# EAGLE board PQ60 EPS FV3 (EAGLE 7.4.0)
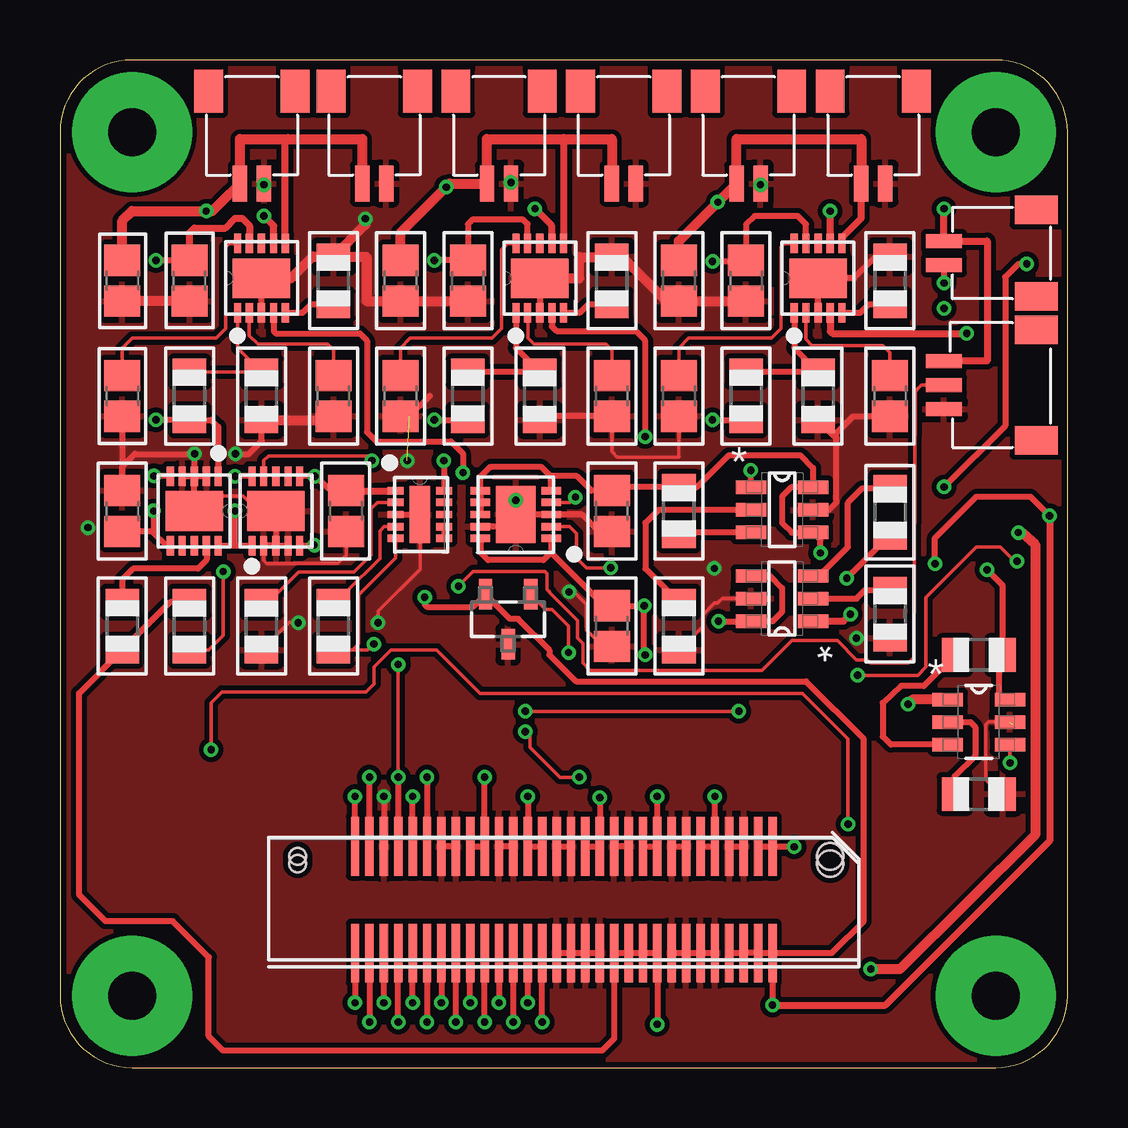
[diagram p0: board, top side]
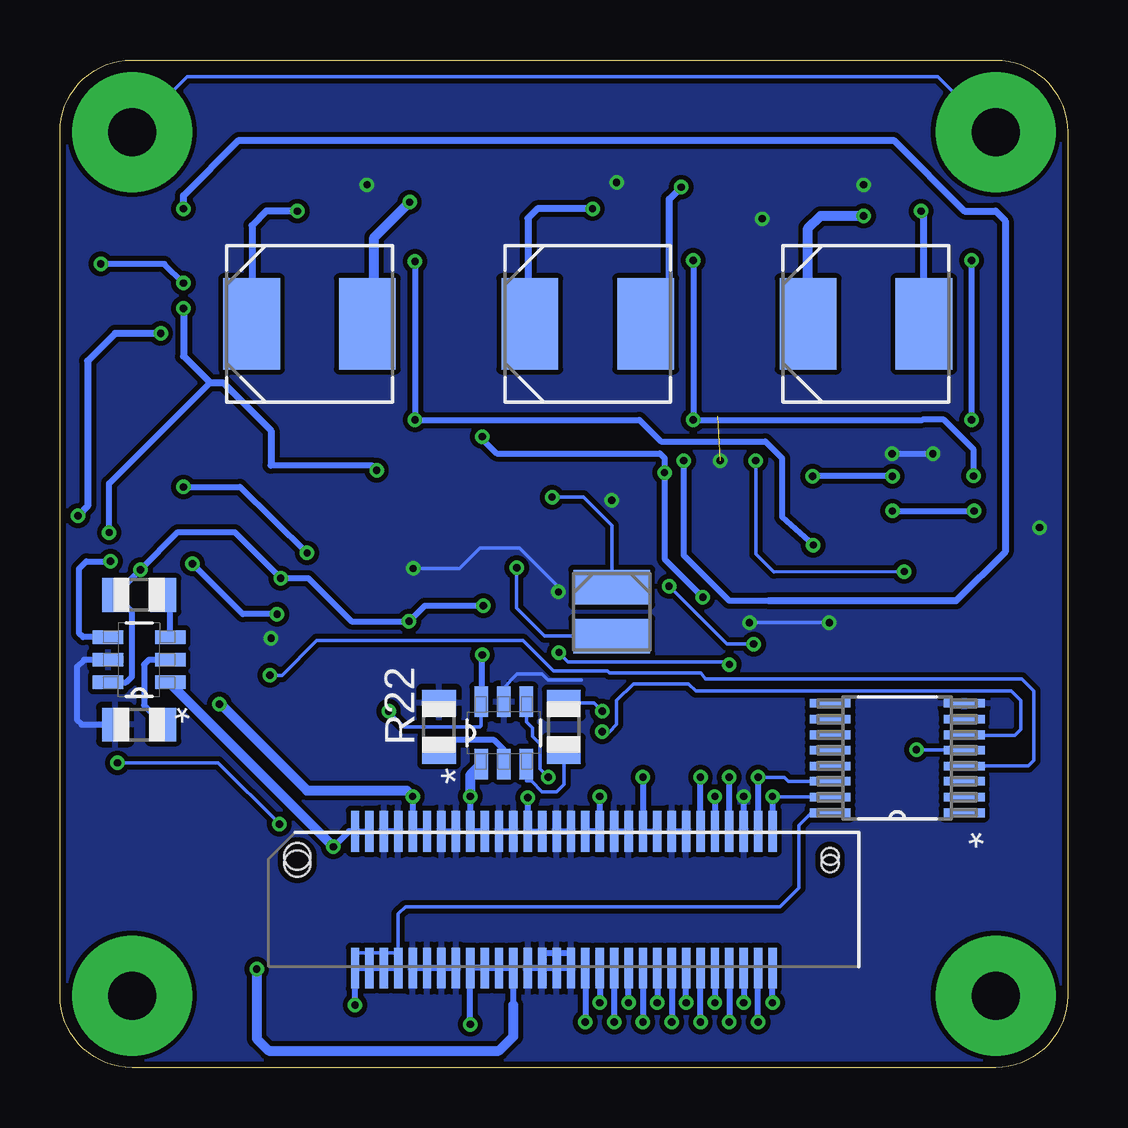
[diagram p1: board, bottom side, seen from below]

Size 42 x 42 mm. Coordinates in mm from the lower left corner, seen from the top.
Outline: 42,3 42,39 arc90 39,42 3,42 arc90 0,39 0,3 arc90 3,0 39,0 arc90 42,3
Copper layers (1*16): Top 0.035mm / dielectric 1.5mm / Bottom 0.035mm
Design rules "SeeedStudio_2layer_DRU_no_angle_20140221 *": minimum track width 6mil, minimum drill 0.3mm, track to track 6mil, track to pad 6mil, pad to pad 6mil, via to via 6mil, smd to smd 0mil, copper to edge 10mil, drill to drill 10mil, minimum pad ring 10mil, minimum via ring 6mil, stop-mask expansion 2mil, vias tented up to drill 100mil, thermal gap 10mil
Net classes: 0 default: clearance 0.205 mm

## Footprints (pad centres in the part's own frame; a part is rotated, then mirrored left to right if it is on the bottom)
C0805 = smd 1.3 x 1.5: 1 -0.85,0; 2 0.85,0
IND_ELL6XH = smd 2.362 x 3.81: 1 -2.413,0; 2 2.413,0
IND_ELL3FU = smd 1.448 x 3.2: 1 -1.016,0; 2 1.016,0
R0805 = smd 1.1 x 1.4: 1 -1,0; 2 1,0
DFN300X300X80-11N = smd 0.813 x 0.305: 1 -1.448,0.991; 2 -1.448,0.508; 3 -1.448,0; 4 -1.448,-0.508; 5 -1.448,-0.991; 6 1.448,-0.991; 7 1.448,-0.508; 8 1.448,0; 9 1.448,0.508; 10 1.448,0.991 | smd 1.651 x 2.388: 11 0,0
SON50P300X300X100-11N = smd 0.813 x 0.305: 1 -1.473,0.991; 2 -1.473,0.508; 3 -1.473,0; 4 -1.473,-0.508; 5 -1.473,-0.991; 6 1.473,-0.991; 7 1.473,-0.508; 8 1.473,0; 9 1.473,0.508; 10 1.473,0.991 | smd 1.651 x 2.388: 11 0,0
SOT95P280X145-6N = smd 1.27 x 0.559: 1 -1.295,0.94; 2 -1.295,0; 3 -1.295,-0.94; 4 1.295,-0.94; 5 1.295,0; 6 1.295,0.94
SON50P200X300X80-11N = smd 0.66 x 0.305: 1 -1.016,0.991; 2 -1.016,0.508; 3 -1.016,0; 4 -1.016,-0.508; 5 -1.016,-0.991; 6 1.016,-0.991; 7 1.016,-0.508; 8 1.016,0; 9 1.016,0.508; 10 1.016,0.991 | smd 0.838 x 2.388: 11 0,0
SOP65P640X110-16N = smd 1.702 x 0.356: 1 -2.794,2.286; 2 -2.794,1.626; 3 -2.794,0.965; 4 -2.794,0.33; 5 -2.794,-0.33; 6 -2.794,-0.965; 7 -2.794,-1.626; 8 -2.794,-2.286; 9 2.794,-2.286; 10 2.794,-1.626; 11 2.794,-0.965; 12 2.794,-0.33; 13 2.794,0.33; 14 2.794,0.965; 15 2.794,1.626; 16 2.794,2.286
SOT95P237X112-3N = smd 0.559 x 1.27: 1 -0.94,-1.041; 2 0.94,-1.041; 3 0,1.041
FX8C-060S-SV(92) = smd 0.35 x 1.7: P$1 -8.7,2.85; P$2 -8.1,2.85; P$3 -7.5,2.85; P$4 -6.9,2.85; P$5 -6.3,2.85; P$6 -5.7,2.85; P$7 -5.1,2.85; P$8 -4.5,2.85; P$9 -3.9,2.85; P$10 -3.3,2.85; P$11 -2.7,2.85; P$12 -2.1,2.85; P$13 -1.5,2.85; P$14 -0.9,2.85; P$15 -0.3,2.85; P$16 0.3,2.85; P$17 0.9,2.85; P$18 1.5,2.85; P$19 2.1,2.85; P$20 2.7,2.85; P$21 3.3,2.85; P$22 3.9,2.85; P$23 4.5,2.85; P$24 5.1,2.85; P$25 5.7,2.85; P$26 6.3,2.85; P$27 6.9,2.85; P$28 7.5,2.85; P$29 8.1,2.85; P$30 8.7,2.85; P$31 8.7,-2.85; P$32 8.1,-2.85; P$33 7.5,-2.85; P$34 6.9,-2.85; P$35 6.3,-2.85; P$36 5.7,-2.85; P$37 5.1,-2.85; P$38 4.5,-2.85; P$39 3.9,-2.85; P$40 3.3,-2.85; P$41 2.7,-2.85; P$42 2.1,-2.85; P$43 1.5,-2.85; P$44 0.9,-2.85; P$45 0.3,-2.85; P$46 -0.3,-2.85; P$47 -0.9,-2.85; P$48 -1.5,-2.85; P$49 -2.1,-2.85; P$50 -2.7,-2.85; P$51 -3.3,-2.85; P$52 -3.9,-2.85; P$53 -4.5,-2.85; P$54 -5.1,-2.85; P$55 -5.7,-2.85; P$56 -6.3,-2.85; P$57 -6.9,-2.85; P$58 -7.5,-2.85; P$59 -8.1,-2.85; P$60 -8.7,-2.85 | hole 1.1: -11.1,1.8 | hole 0.7: 11.1,1.8
FX8C-060P-SV(92) = smd 0.35 x 2.45: P$1 -8.7,-2.225; P$2 -8.1,-2.225; P$3 -7.5,-2.225; P$4 -6.9,-2.225; P$5 -6.3,-2.225; P$6 -5.7,-2.225; P$7 -5.1,-2.225; P$8 -4.5,-2.225; P$9 -3.9,-2.225; P$10 -3.3,-2.225; P$11 -2.7,-2.225; P$12 -2.1,-2.225; P$13 -1.5,-2.225; P$14 -0.9,-2.225; P$15 -0.3,-2.225; P$16 0.3,-2.225; P$17 0.9,-2.225; P$18 1.5,-2.225; P$19 2.1,-2.225; P$20 2.7,-2.225; P$21 3.3,-2.225; P$22 3.9,-2.225; P$23 4.5,-2.225; P$24 5.1,-2.225; P$25 5.7,-2.225; P$26 6.3,-2.225; P$27 6.9,-2.225; P$28 7.5,-2.225; P$29 8.1,-2.225; P$30 8.7,-2.225; P$31 8.7,2.225; P$32 8.1,2.225; P$33 7.5,2.225; P$34 6.9,2.225; P$35 6.3,2.225; P$36 5.7,2.225; P$37 5.1,2.225; P$38 4.5,2.225; P$39 3.9,2.225; P$40 3.3,2.225; P$41 2.7,2.225; P$42 2.1,2.225; P$43 1.5,2.225; P$44 0.9,2.225; P$45 0.3,2.225; P$46 -0.3,2.225; P$47 -0.9,2.225; P$48 -1.5,2.225; P$49 -2.1,2.225; P$50 -2.7,2.225; P$51 -3.3,2.225; P$52 -3.9,2.225; P$53 -4.5,2.225; P$54 -5.1,2.225; P$55 -5.7,2.225; P$56 -6.3,2.225; P$57 -6.9,2.225; P$58 -7.5,2.225; P$59 -8.1,2.225; P$60 -8.7,2.225 | hole 1.1: -11.1,-1.5 | hole 0.7: 11.1,-1.5
JST-SH-02 = smd 0.6 x 1.5: P1 -0.5,-2.35; P2 0.5,-2.35 | smd 1.2 x 1.8: P$1 1.8,1.5; P$2 -1.8,1.5
JST-SH-03 = smd 0.6 x 1.5: P1 -1,-2.25; P2 0,-2.25; P3 1,-2.25 | smd 1.2 x 1.8: P$2 -2.3,1.6; P$3 2.3,1.6

## Placement (x,y rotation side)
C1  10uF  [C0805]  25.8,32.8 90 top
C2  10uF  [C0805]  14.2,32.8 90 top
C3  10uF  [C0805]  2.6,32.8 90 top
C4  10uF  [C0805]  5.4,32.8 270 top
C5  10uF  [C0805]  17,32.8 270 top
C6  10uF  [C0805]  28.6,32.8 270 top
C7  4.7uF  [C0805]  2.6,23.2 270 top
C8  4.7uF  [C0805]  11.92,23.2 90 top
C9  10uF  [C0805]  23,23.2 90 top
C10  10uF  [C0805]  23,18.4 90 top
C11  4.7uF  [C0805]  11.4,28 270 top
C12  4.7uF  [C0805]  23,28 270 top
C13  4.7uF  [C0805]  34.6,28 270 top
C14  1uF  [C0805]  14.2,28 270 top
C15  1uF  [C0805]  25.8,28 270 top
C16  1uF  [C0805]  2.6,28 270 top
L1  10UH  [IND_ELL6XH]  8.4,31 0 bottom
L2  10UH  [IND_ELL6XH]  20,31 0 bottom
L3  10UH  [IND_ELL6XH]  31.6,31 0 bottom
L4  2.2UH  [IND_ELL3FU]  19,19 270 bottom
R1  470k  [R0805]  5.4,18.4 90 top
R2  470k  [R0805]  2.6,18.4 270 top
R3  35.7k  [R0805]  25.8,18.4 270 top
R4  35.7k  [R0805]  34.6,18.9 270 top
R5  35.7k  [R0805]  25.8,23.2 270 top
R6  35.7k  [R0805]  34.6,23.15 90 top
R7  35.7k  [R0805]  38.7,14.3 180 bottom
R8  35.7k  [R0805]  38.7,19.7 0 bottom
R9  15k  [R0805]  17,28 270 top
R10  4.7k  [R0805]  20,28 90 top
R11  15k  [R0805]  5.4,28 270 top
R12  4.7k  [R0805]  8.4,28 90 top
R13  4.7k  [R0805]  31.6,28 90 top
R14  15k  [R0805]  28.6,28 270 top
R15  466k  [R0805]  23,32.8 270 top
R16  466k  [R0805]  34.6,32.8 270 top
R17  466k  [R0805]  11.4,32.8 270 top
R18  787  [R0805]  8.4,18.4 90 top
R19  21.5k  [R0805]  11.4,18.4 270 top
R20  35.7k  [R0805]  38.3,11.4 0 top
R21  35.7k  [R0805]  38.3,17.2 180 top
R22  35.7k  [R0805]  26.2,14.2 90 bottom
R23  35.7k  [R0805]  21,14.2 270 bottom
U1  LTC3105EDDPBF  [DFN300X300X80-11N]  8.4,32.9 90 top
U2  LTC3105EDDPBF  [DFN300X300X80-11N]  20,32.9 90 top
U3  LTC3105EDDPBF  [DFN300X300X80-11N]  31.6,32.9 90 top
U4  LTC4413EDDPBF  [DFN300X300X80-11N]  5.6,23.2 270 top
U5  LTC4413EDDPBF  [DFN300X300X80-11N]  9,23.2 90 top
U6  TPS63001DRCR  [SON50P300X300X100-11N]  19,23.05 180 top
U7  TPS2552DBVT  [SOT95P280X145-6N]  30.1,23.25 0 top
U8  TPS2552DBVT  [SOT95P280X145-6N]  30.1,19.55 180 top
U9  BQ24210DQCT  [SON50P200X300X80-11N]  15,23.05 0 top
U10  PCA9534PW  [SOP65P640X110-16N]  7.1,12.9 180 bottom
U11  TPS2552DBVT  [SOT95P280X145-6N]  38.7,17 180 bottom
U12  TPS2552DBVT  [SOT95P280X145-6N]  38.3,14.4 0 top
U13  TPS2552DBVT  [SOT95P280X145-6N]  23.5,13.95 90 bottom
U$1  MCP130T-315I/TT  [SOT95P237X112-3N]  18.68,18.69 180 top
U$2  FX8C-060S-SV(92)  [FX8C-060S-SV(92)]  21,7 0 bottom
U$3  FX8C-060P-SV(92)  [FX8C-060P-SV(92)]  21,7 180 top
U$4  JST-SH-02  [JST-SH-02]  8,39.2 0 top
U$5  JST-SH-02  [JST-SH-02]  13.1,39.2 0 top
U$6  JST-SH-02  [JST-SH-02]  23.5,39.2 0 top
U$7  JST-SH-02  [JST-SH-02]  18.3,39.2 0 top
U$8  JST-SH-02  [JST-SH-02]  28.7,39.2 0 top
U$9  JST-SH-02  [JST-SH-02]  33.9,39.2 0 top
U$10  JST-SH-02  [JST-SH-02]  39.2,33.95 270 top
U$11  JST-SH-03  [JST-SH-03]  39.1,28.45 270 top

## Library data of the parts
C1-C16 R1-R23 = adafruit
L1-L3 = Panasonic-ELL; MPN: ELL6SH100M; OC_FARNELL: 1539555; OC_NEWARK: 95M4201; PACKAGE: SMD; SUPPLIER: PANASONIC
L4 = Panasonic-ELL; CURRENTRATING: 1.6A; MPN: ELL3FU2R2N; OC_FARNELL: 1888686; OC_NEWARK: 56T0899; PACKAGE: SMD-3FU; SUPPLIER: PANASONIC; TOLERANCE: ±30 %
U1-U3 = LTC3105; MPN: LTC3105EDD#PBF; OC_FARNELL: 1898600; OC_NEWARK: 27T5809; PACKAGE: DFN-10; SUPPLIER: Linear Technology
U4 U5 = LTC4413; MPN: LTC4413EDD#PBF; OC_FARNELL: 1663736; OC_NEWARK: 56M9529; PACKAGE: DFN-10; SUPPLIER: Linear Technology
U6 = TPS63001; MPN: TPS63001DRCR; OC_FARNELL: -; OC_NEWARK: 85K1711; PACKAGE: SON-10; SUPPLIER: TEXAS INSTRUMENTS
U7 U8 U11-U13 = TPS2552; MPN: TPS2552DBVT; OC_FARNELL: 1694421; OC_NEWARK: 40P3866; PACKAGE: SOT-23-6; SUPPLIER: Texas Instruments
U9 = BQ24210; MPN: BQ24210DQCT; OC_FARNELL: 1903633; OC_NEWARK: 56T0491; PACKAGE: SON-10; SUPPLIER: TEXAS INSTRUMENTS
U10 = PCA9534PW; MPN: PCA9534PW; OC_FARNELL: 2212090; OC_NEWARK: 55W4311; PACKAGE: TSSOP16; SUPPLIER: NXP
U$1 = MCP130T; MPN: MCP130T-315I/TT; OC_FARNELL: 3021154; OC_NEWARK: 96K3703; PACKAGE: SOT-3; SUPPLIER: Microchip
U$2 U$3 = PQ60
U$4-U$10 = JST SH 02
U$11 = JST SH 03

## Nets
!RST: U$1.1 U$2.P$27 U$3.P$27
+3V3: U1.4 U2.4 U3.4 U8.1 U10.16 U$1.2 U$2.P$57 U$2.P$58 U$2.P$59 U$2.P$60 U$3.P$57 U$3.P$58 U$3.P$59 U$3.P$60
+3V3_SW1: U11.1 U$2.P$1 U$2.P$2 U$3.P$1 U$3.P$2
+3V3_SW2: U12.1 U$2.P$5 U$2.P$6 U$3.P$5 U$3.P$6
+3V3_SW3: U13.1 U$2.P$9 U$2.P$10 U$3.P$9 U$3.P$10
BATTERY: C9.2 R5.1 U6.5 U6.6 U6.7 U6.8 U7.4 U7.6 U$10.P2
BATV: R1.2 R2.2 U7.1 U$2.P$49 U$2.P$50 U$2.P$51 U$2.P$52 U$3.P$49 U$3.P$50 U$3.P$51 U$3.P$52
BATV_SW1: U$2.P$13 U$2.P$14 U$3.P$13 U$3.P$14
BATV_SW2: U$2.P$17 U$2.P$18 U$3.P$17 U$3.P$18
BATV_SW3: U$2.P$21 U$2.P$22 U$3.P$21 U$3.P$22
GND: C1.1 C2.1 C3.1 C4.2 C5.2 C6.2 C7.1 C8.1 C9.1 C10.1 C11.2 C12.2 C13.2 C14.2 C15.2 C16.2 R3.2 R4.2 R7.2 R10.1 R12.1 R13.1 R15.1 R16.1 R17.1 R18.1 R20.2 R22.2 U1.3 U1.11 U2.3 U2.11 U3.3 U3.11 U4.2 U4.3 U4.4 U4.11 U5.2 U5.3 U5.4 U5.11 U6.3 U6.9 U6.11 U7.5 U8.5 U9.3 U9.11 U10.8 U11.5 U12.5 U13.5 U$1.3 U$2.P$3 U$2.P$4 U$2.P$7 U$2.P$8 U$2.P$11 U$2.P$12 U$2.P$15 U$2.P$16 U$2.P$19 U$2.P$20 U$2.P$23 U$2.P$24 U$2.P$28 U$2.P$45 U$2.P$46 U$2.P$47 U$2.P$48 U$2.P$53 U$2.P$54 U$2.P$55 U$2.P$56 U$3.P$3 U$3.P$4 U$3.P$7 U$3.P$8 U$3.P$11 U$3.P$12 U$3.P$15 U$3.P$16 U$3.P$19 U$3.P$20 U$3.P$23 U$3.P$24 U$3.P$28 U$3.P$45 U$3.P$46 U$3.P$47 U$3.P$48 U$3.P$53 U$3.P$54 U$3.P$55 U$3.P$56 U$4.P2 U$5.P2 U$6.P2 U$7.P2 U$8.P2 U$9.P2 U$11.P3
GPIO0: U$2.P$25 U$3.P$25
GPIO1: U$2.P$26 U$3.P$26
GPIO2: U$2.P$34 U$3.P$34
GPIO3: U$2.P$35 U$3.P$35
GPIO4: U$2.P$36 U$3.P$36
GPIO5: U$2.P$37 U$3.P$37
GPIO6: U$2.P$38 U$3.P$38
GPIO7: U$2.P$39 U$3.P$39
GPIO8: U$2.P$40 U$3.P$40
GPIO9: U$2.P$41 U$3.P$41
GPIO10: U$2.P$42 U$3.P$42
GPIO11: U$2.P$43 U$3.P$43
GPIO12: U$2.P$44 U$3.P$44
MISO: U$2.P$32 U$3.P$32
MOSI: U$2.P$31 U$3.P$31
N$1: L2.1 U2.7
N$2: L3.1 U3.7
N$3: L1.1 U1.7
N$4: L4.1 U6.4
N$5: C4.1 R11.2 U1.9 U4.1
N$6: C5.1 R9.2 U2.9 U4.5
N$7: C6.1 R14.2 U3.9 U5.5
N$8: R4.1 U8.2
N$9: C7.2 U4.6 U4.10 U5.1
N$10: R1.1 U5.9
N$11: R2.1 U4.9
N$12: L4.2 U6.2
N$13: R3.1 U7.2
N$14: R5.2 U7.3
N$15: R6.2 U8.3
N$16: R7.1 U11.2
N$17: R8.2 U11.3
N$18: R13.2 R14.1 U3.1
N$19: C11.1 U1.2
N$20: C12.1 U2.2
N$21: C13.1 U3.2
N$22: C14.1 U2.10
N$23: C15.1 U3.10
N$24: C16.1 U1.10
N$25: R11.1 R12.2 U1.1
N$26: R9.1 R10.2 U2.1
N$28: R15.2 U2.5
N$29: R16.2 U3.5
N$30: R17.2 U1.5
N$31: C8.2 U5.6 U5.10 U9.1
N$32: U9.6 U9.7
N$33: R18.2 U9.2
N$34: U9.10 U$10.P1 U$11.P1
N$35: R19.2 U9.5 U$11.P2
N$36: R19.1 U9.4
N$38: R20.1 U12.2
N$39: R21.2 U12.3
N$40: R22.1 U13.2
N$41: R23.2 U13.3
PANEL1+2: C3.2 L1.2 U1.6 U$4.P1 U$5.P1
PANEL3+4: C2.2 L2.2 U2.6 U$6.P1 U$7.P1
PANEL5+6: C1.2 L3.2 U3.6 U$8.P1 U$9.P1
SCK: U$2.P$33 U$3.P$33
SCL: U10.14 U$2.P$29 U$3.P$29
SDA: U10.15 U$2.P$30 U$3.P$30
SW1_EN: U10.4 U11.4
SW2_EN: U10.5 U12.4
SW3_EN: U10.6 U13.4
UNPROTECTED3V3: C10.2 R6.1 R8.1 R21.1 R23.1 U6.1 U6.10 U8.4 U8.6 U11.6 U12.6 U13.6

## Tracks (layer width: path | path; a pad name or v marks a point on that pad's centre or on a via)
!RST  (via drill 0.3)
  Top 0.152: v14.1,16.8 v14.1,12.1 | v21.2,17.3 21.2,18.4 20.5,19.1 20.25,19.1 U$1.1
  Top 0.254: U$3.P$27 v14.1,12.1 v14.09,12.11
  Bottom 0.152: v14.1,16.8 14.21,16.92 20.82,16.92 v21.2,17.3
  Bottom 0.254: U$2.P$27 v14.1,12.1
+3V3  (via drill 0.3)
  Top 0.254: U$3.P$57 U$3.P$58 U$3.P$59 U$3.P$60 | U8.1 31.39,18.57 | U$3.P$60 v29.7,2.6 | U1.4 8.91,30.69 9,30.6 12.5,30.6 12.8,30.3 12.8,26.5 13.2,26.1 16.3,26.1 16.8,25.6 v16.8,24.8 | v15.2,19.6 15.2,19.3 15.3,19.2 17.21,19.2 U$1.2 18.77,18.7 19.1,18.7 20.4,17.4 20.4,17.2 21.5,16.1 31.1,16.1 33.5,13.7 33.5,6.1 32.17,4.78 U$3.P$60 | U2.4 20.51,30.89 20.7,30.7 24,30.7 24.4,30.3 v24.4,26.3 | v36.48,21 36.48,22.08 38.2,23.8 40.45,23.8 v41.25,23
  Top 0.3: U3.4 32.11,30.69 32.2,30.6 v37.8,30.6 | v41.25,23 41.25,9.45 34.4,2.6 v29.7,2.6 | U8.1 32.66,18.61 v32.95,18.9
  Bottom 0.152: U10.16 10.69,10.61 11.2,10.1 11.2,7.5 12,6.7 27.6,6.7 27.9,6.4 U$3.P$57 U$3.P$60
  Bottom 0.254: U$2.P$60 U$2.P$59 U$2.P$58 U$2.P$57 | U$2.P$60 U$3.P$60 | v29.7,2.6 U$2.P$60 | v15.2,19.6 16.8,21.2 v16.8,24.8 16.8,25.4 17,25.6 23.8,25.6 24.4,26.2 v24.4,26.3 | v32.95,18.9 34.38,18.9 v36.48,21
  Bottom 0.3: v37.8,30.6 39.7,30.6 40.85,29.45 40.85,23.4 v41.25,23
+3V3_SW1  (via drill 0.3)
  Top 0.254: v30.6,9.2 29.73,9.2 U$3.P$1 U$3.P$2
  Bottom 0.254: U$2.P$2 U$2.P$1 29.95,9.85 v30.6,9.2
  Bottom 0.406: v30.6,9.2 37.41,16 U11.1
+3V3_SW2  (via drill 0.3)
  Top 0.254: U$3.P$6 U$3.P$5 v27.3,11.3
  Top 0.406: U12.1 35.54,15.34 v35.35,15.15
  Bottom 0.254: U$2.P$6 U$2.P$5 v27.3,11.3
  Bottom 0.406: v35.35,15.15 35.3,15.15 31.7,11.55 27.55,11.55 v27.3,11.3
+3V3_SW3  (via drill 0.3)
  Top 0.254: U$3.P$10 U$3.P$9 v24.9,11.3
  Bottom 0.254: U$2.P$10 U$2.P$9 | v24.9,11.3 U$2.P$9 | 24.9,9.1 U$2.P$9
  Bottom 0.406: U13.1 24.9,12.19 v24.9,11.3
BATTERY  (via drill 0.3)
  Top 0.254: U6.8 U6.7 U6.6 17.53,24.63 17.95,25.05 20.05,25.05 20.47,24.63 | U6.5 20.47,24.63 | 20.47,24.63 20.5,24.65 21.55,24.65 22.15,24.05 C9.2 23.15,24.2 R5.1 26.56,24.2 27.89,25.53 30.86,25.53 31.39,25 U7.6 30.49,24.19 30.1,23.8 30.1,22.7 30.5,22.3 31.39,22.3 U7.4 31.7,22.01 v31.7,21.45 | U$10.P2 v36.85,32.7 | v40.3,33.5 39.95,33.5 39.4,32.95 39.4,26.75 v36.85,24.2
  Bottom 0.254: v36.85,32.7 37.65,33.5 v40.3,33.5 | v36.85,24.2 34.5,24.2 v31.7,21.45
BATV  (via drill 0.3)
  Top 0.254: R1.2 4.6,19.4 R2.2 0.8,15.6 0.8,7.2 1.9,6.1 4.7,6.1 6.2,4.6 6.2,1.3 6.8,0.7 22.6,0.7 23.1,1.2 U$3.P$49 U$3.P$50 U$3.P$51 U$3.P$52 v24.9,1.8 | U7.1 v28.8,24.89 v28.8,24.9
  Top 0.406: v39.95,22.3 40.1,22.3 40.65,21.8 40.65,9.7 35,4.1 v33.8,4.1
  Bottom 0.254: v28.8,24.9 29,25.1 33.2,25.1 | v39.95,22.3 39.95,24.35 35.75,28.55 | v24.9,1.8 U$2.P$52 U$2.P$51 U$2.P$50 U$2.P$49 23.1,2.6
  Bottom 0.3: v36.85,31.65 36.85,29.65 35.75,28.55 35.2,28.55 33.2,26.55 33.2,25.1
  Bottom 0.406: v33.8,4.1 33.8,1.2 33.3,0.7 23.7,0.7 23.1,1.3 23.1,2.6
BATV_SW1  (via drill 0.3)
  Top 0.254: U$3.P$14 U$3.P$13 v22.5,11.25
  Bottom 0.254: U$2.P$14 U$2.P$13 v22.5,11.25
BATV_SW2  (via drill 0.3)
  Top 0.254: U$3.P$17 U$3.P$18 v19.5,11.3
  Bottom 0.254: U$2.P$17 U$2.P$18 v19.5,11.3
BATV_SW3  (via drill 0.3)
  Top 0.254: U$3.P$22 U$3.P$21 v17.7,12.1
  Bottom 0.254: U$2.P$22 U$2.P$21 v17.7,12.1
CHASSIS_GND  (via drill 2 pad 5)
  Bottom 0.152: v3,39 3.1,39 5.4,41.3 36.7,41.3 v39,39
GND  (via drill 0.3)  (2 unrouted)
  Top 0.152: U5.11 8.27,23.2 7.64,23.83 6.23,23.83 U4.11 | C15.2 25.81,25.45 23.22,25.45 23,25.67 C12.2 | C8.1 11.92,21.35 11.58,21.01 8.61,21.01 8.48,21.14 U5.2 | U9.11 15,20.77 13.26,19.03 v13.26,18.54 | v9.93,18.54 9.54,18.54 R18.1 | R3.2 26.8,18.39 26.8,18.87 27.28,19.36 27.41,19.36 27.61,19.56 U8.5 | 22.6,17.55 C10.1 22.65,17.55 21.95,18.25 21.95,19.3 21.43,19.82 v21.23,19.82 | U12.5 38.7,14.4 38.6,14.3 38.6,12 39.2,11.4 R20.2
  Top 0.254: U$3.P$45 U$3.P$46 U$3.P$47 U$3.P$48 | U$3.P$53 U$3.P$54 U$3.P$55 U$3.P$56 | U9.3 U9.11 | U5.11 U5.3 | U5.3 U5.4 | U5.3 U5.2 | U4.11 U4.3 | U4.3 U4.2 | U4.3 U4.4 U4.3 5.61,24.64 v5.61,25.58 3.12,25.58 2.6,25.05 C7.1 C16.2 | U1.3 U1.11 | U2.11 U2.3 | v13.5,11.3 U$3.P$28 | U$3.P$23 U$3.P$24 | U$3.P$19 U$3.P$20 | U$3.P$16 U$3.P$15 | U$3.P$11 U$3.P$12 | U$3.P$8 U$3.P$7 | U$3.P$4 U$3.P$3 | C9.1 22.45,22.35 21.75,23.05 U6.3 U6.11 18.85,23.05 18.35,22.55 U6.9 | v7.32,25.58 7.87,25.58 8.41,26.11 R12.1 | 31.67,32.92 31.62,32.92 U3.11 U3.3 31.6,33 31.67,32.92 | R16.1 34.97,34.17 | 31.67,32.92 33.12,32.92 34.01,33.81 34.62,33.81 | C12.2 20.15,27.15 R10.1 | C14.2 14.57,27.15 15.42,27.99 | 32.38,26.23 32.38,23.56 32.05,23.24 U7.5 | 32.38,26.23 R13.1 | 32.38,26.23 32.38,26.46 33.07,27.15 C13.2
  Top 0.406: C4.2 C3.1 | R17.1 12.78,33.8 12.78,31.95 C2.1 C5.2 | U2.11 21.64,32.9 21.64,33.78 23,33.78 | 23,33.78 R15.1 22.99,33.8 | 23,33.78 23.44,33.78 25.25,31.98 25.77,31.98 C1.1 C6.2 | U1.11 9.63,32.9 10.54,33.81 R17.1 | v12.72,35.38 12.72,35.12 R17.1 | R12.1 11.25,27 C11.2
  Bottom 0.152: v13.26,18.54 v9.93,18.54 | U13.5 23.5,15.8 23.2,16.15 22.95,16.4 21.9,16.4 21.65,16.15 20.25,16.15 | v27.28,20.8 v27.27,20.8 25.35,20.8 24.5,21.65 22.85,21.65 21.23,20.02 v21.23,19.82
  Bottom 0.254: U$2.P$23 U$2.P$24 | U$2.P$19 U$2.P$20 | U$2.P$15 U$2.P$16 | U$2.P$11 U$2.P$12 | U$2.P$7 U$2.P$8 | U$2.P$4 U$2.P$3 | U$2.P$45 U$2.P$46 U$2.P$47 U$2.P$48 | U$2.P$56 U$2.P$55 U$2.P$54 U$2.P$53 | U$2.P$28 v13.5,11.3 | U$3.P$47 U$3.P$45 | v5.61,25.58 v7.32,25.58 | U11.5 41,17 41.3,16.7 41.3,14.5 41.1,14.3 R7.2
  Bottom 0.406: v12.73,35.39 v12.72,35.38
  other vias: 1.17,22.5 14.48,25.3 19,23.65 8.5,36.8 18.8,36.9 29.2,36.8 33.2,17.9
  pour Top: 22.85,42 2.85,42 arc90 0,39.15 0,2.95 arc90 2.95,0 38.9,0 arc90 42,3.1 42,38.9 arc90 38.9,42
  pour Bottom: 20.98,42.01 3.05,42.01 arc90 0,38.96 0,3.1 arc90 3.1,0 39.04,0 arc90 41.99,2.95 41.99,39.01 arc90 39.01,41.99 37.49,41.99 arc90 37.44,41.94
GPIO0  (via drill 0.3)
  Top 0.254: v15.3,12.1 U$3.P$25
  Bottom 0.254: U$2.P$25 v15.3,12.1
GPIO1  (via drill 0.3)
  Top 0.254: U$3.P$26 v14.7,11.3
  Bottom 0.254: v14.7,11.3 U$2.P$26
GPIO2  (via drill 0.3)
  Top 0.254: v14.1,1.9 U$3.P$34
  Bottom 0.254: U$2.P$34 v14.1,1.9
GPIO3  (via drill 0.3)
  Top 0.254: v14.7,2.7 U$3.P$35
  Bottom 0.254: U$2.P$35 v14.7,2.7
GPIO4  (via drill 0.3)
  Top 0.254: U$3.P$36 v15.3,1.9
  Bottom 0.254: v15.3,1.9 U$2.P$36
GPIO5  (via drill 0.3)
  Top 0.254: U$3.P$37 v15.9,2.7
  Bottom 0.254: v15.9,2.7 U$2.P$37
GPIO6  (via drill 0.3)
  Top 0.254: v16.5,1.9 U$3.P$38
  Bottom 0.254: U$2.P$38 v16.5,1.9
GPIO7  (via drill 0.3)
  Top 0.254: v17.1,2.7 U$3.P$39
  Bottom 0.254: U$2.P$39 v17.1,2.7
GPIO8  (via drill 0.3)
  Top 0.254: v17.7,1.9 U$3.P$40
  Bottom 0.254: U$2.P$40 v17.7,1.9
GPIO9  (via drill 0.3)
  Top 0.254: U$3.P$41 v18.3,2.7
  Bottom 0.254: v18.3,2.7 U$2.P$41
GPIO10  (via drill 0.3)
  Top 0.254: v18.9,1.9 U$3.P$42
  Bottom 0.254: U$2.P$42 v18.9,1.9
GPIO11  (via drill 0.3)
  Top 0.254: v19.5,2.7 U$3.P$43
  Bottom 0.254: U$2.P$43 v19.5,2.7
GPIO12  (via drill 0.3)
  Top 0.254: v20.1,1.9 U$3.P$44
  Bottom 0.254: U$2.P$44 v20.1,1.9
MISO  (via drill 0.3)
  Top 0.254: U$3.P$32 v12.9,1.9
  Bottom 0.254: v12.9,1.9 U$2.P$32
MOSI  (via drill 0.3)
  Top 0.254: U$3.P$31 v12.3,2.7
  Bottom 0.254: v12.3,2.7 U$2.P$31
N$1  (via drill 0.3)
  Top 0.3: U2.7 20.51,35.09 v19.8,35.8
  Bottom 0.3: v19.8,35.8 22.1,35.8 22.5,35.4 22.5,31.09 L2.1
N$2  (via drill 0.3)
  Top 0.3: U3.7 v32.11,35.69 v32.1,35.7
  Bottom 0.254: 34.05,31.04 L3.1
  Bottom 0.3: v32.1,35.7 33.4,35.7 34,35.1 34,31.01 L3.1
N$3  (via drill 0.3)
  Top 0.3: U1.7 8.91,35.09 v8.5,35.5
  Bottom 0.406: L1.1 10.81,34.99 10.3,35.5 v8.5,35.5
N$4  (via drill 0.3)
  Top 0.152: U6.4 21.27,23.56 v21.49,23.78
  Bottom 0.152: v21.49,23.78 20.18,23.78 19,22.6 L4.1
N$5  (via drill 0.3)
  Top 0.254: U1.9 | v4,27 R11.2 6.3,27 6.6,26.7 U4.1 | v4,33.65 C4.1
  Top 0.3: C4.1 5.4,34.8 5.6,35 6.9,35 7.3,35.4 7.6,35.4 7.9,35.1 U1.9
  Bottom 0.254: v4,27 v4,33.65
N$6  (via drill 0.3)
  Top 0.254: v15.6,33.65 C5.1 17,35.15 17.2,35.35 19.3,35.35 19.49,35.16 U2.9 | v15.6,27 R9.2 | U4.5 v3.92,24.66 v3.91,24.66
  Bottom 0.254: v15.6,33.65 v15.6,27 6.05,27 5.16,27 3.91,25.76 v3.91,24.66
N$7  (via drill 0.3)
  Top 0.152: U5.5
  Top 0.254: v27.2,33.6 28.55,33.6 C6.1 28.6,35.15 28.95,35.5 30.75,35.5 31.1,35.15 U3.9 | v27.2,27 R14.2 | U5.5 10.7,21.75 v10.6,21.77
  Bottom 0.254: v27.2,33.6 v27.2,27 17.85,27 16.95,26.1 12.6,26.1 11.9,25.4 11.9,22.95 v10.6,21.77
N$8
  Top 0.254: U8.2 33.2,19.55 33.55,19.9 R4.1
N$9  (via drill 0.3)
  Top 0.254: U4.6 4.45,21.75 3.85,22.35 | 3.85,22.35 C7.2 | U5.1 U4.10 7.3,21.75 v7.3,23.2 | v3.9,23.2 3.9,22.4 3.85,22.35
  Bottom 0.254: v7.3,23.2 v3.9,23.2
N$10  (via drill 0.3)
  Top 0.152: U5.9 8.49,25.29 8.7,25.5 12.8,25.5 v13,25.3 | R1.1 6.2,17.4 6.81,18.01 v6.81,20.68
  Top 0.254: U5.9
  Bottom 0.152: v6.81,20.68 12.25,20.65 13,21.4 v13,25.3
N$11
  Top 0.254: R2.1 2.6,20.35 3.05,20.8 5.75,20.8 6.11,21.16 U4.9
N$12  (via drill 0.3)
  Top 0.152: U6.2 21.25,22.54 21.54,22.25 21.54,21.24 21.95,20.83 v22.96,20.83
  Bottom 0.152: v22.96,20.83 22.96,19.15 21.79,17.98 L4.2
N$13
  Top 0.254: U7.2 24.95,23.25 24.4,22.7 24.4,20.8 R3.1
N$14
  Top 0.254: U7.3 25.91,22.31 R5.2
N$15
  Top 0.254: U8.3 31.64,20.49 32.85,21.7 32.85,23.55 33.45,24.15 R6.2
N$16
  Bottom 0.254: U11.2 38.3,17 38.5,16.8 38.5,15.1 R7.1
N$17
  Bottom 0.254: U11.3 37.41,19.41 R8.2
N$18
  Top 0.254: U3.1 30.61,29.99 R13.2 R14.1
N$19
  Top 0.152: C11.1 11.4,29.9 11.15,30.15 8.25,30.15 7.89,30.51 U1.2
N$20
  Top 0.152: U2.2 19.5,30.4 19.75,30.15 22.75,30.15 23,29.9 C12.1
N$21
  Top 0.152: U3.2 31.09,30.36 31.35,30.1 34.3,30.1 34.6,29.8 C13.1
N$22
  Top 0.152: U2.10 18.65,34.35 18.4,34.1 18.4,30.8 18,30.4 14.6,30.4 14.2,30 C14.1
N$23
  Top 0.152: U3.10 30.2,34.35 30.05,34.2 30.05,30.8 29.65,30.4 26.2,30.4 25.8,30 C15.1
N$24
  Top 0.152: U1.10 7.05,34.35 6.9,34.2 6.9,30.8 6.5,30.4 3,30.4 2.6,30 C16.1
N$25
  Top 0.152: U1.1 7.41,29.99 R12.2 R11.1
N$26
  Top 0.254: U2.1 19.01,29.99 R10.2 R9.1
N$27  (via drill 2 pad 5)
  other vias: 3,3
N$28
  Top 0.254: R15.2 22,31.8 21.65,31.45 U2.5
N$29
  Top 0.254: R16.2 33.7,31.8 33.35,31.45 U3.5
N$30
  Top 0.254: R17.2 10.45,31.8 10.1,31.45 U1.5
N$31  (via drill 0.3)
  Top 0.254: U5.10 v7.3,24.65 | U5.6 v10.62,24.65 11.3,24.05 C8.2
  Top 0.3: C8.2 12.01,24.04 U9.1
  Bottom 0.254: v7.3,24.65 v10.62,24.65
N$32
  Top 0.254: U9.7 U9.6
N$33
  Top 0.152: R18.2 8.7,19.4 9.95,20.65 12.25,20.65 12.97,21.38 12.97,23.3 13.23,23.56 U9.2
N$34  (via drill 0.3)
  Top 0.254: v16,25.3 16,24.06 U9.10
  Top 0.3: v36.85,35.8 U$10.P1 38.65,34.45 38.65,29.45 U$11.P1
  Bottom 0.254: 12.45,19.45 14.1,19.45 16,21.35 v16,25.3
  Bottom 0.3: 12.45,19.45 4.65,19.45 2.6,21.5 2.6,35.3 3,35.7 4.3,35.7 7.25,38.65 34.55,38.65 36.85,36.35 v36.85,35.8
N$35  (via drill 0.3)
  Top 0.152: U9.5 13.98,21.23 12.45,19.7 12.45,17.65 12.2,17.4 R19.2 12.83,17.4 v13.08,17.65 | U$11.P2 35.9,28.45 35.7,28.25 35.71,28.24 35.65,28.18 35.6,17.1 35.36,16.86 33.79,16.86 33.65,17 33.2,17 32.4,17.8 30.5,17.8 29.26,16.56 22.1,16.56 21.79,16.87 21.79,17.68 21.57,17.9 21.57,18.63 20.4,19.81 20.4,19.83 | v16.61,20.07 17.22,20.68 20.22,20.68 20.3,20.6 20.3,19.93 20.4,19.83 | 20.4,19.83
  Bottom 0.152: v13.08,17.65 14.2,17.65 v16.61,20.07
N$36
  Top 0.152: 11.5,19.4 R19.1 11.8,19.8 11.9,19.8 13.35,21.23 13.35,22.38 13.52,22.54 U9.4
N$37  (via drill 2 pad 5)
  other vias: 39,3
N$38
  Top 0.254: U12.2 37.95,14.4 38.15,14.2 38.15,13 37.3,12.15 R20.1
N$39
  Top 0.254: U12.3 34.64,13.46 34.3,13.8 34.3,15.2 35.05,15.9 36,15.9 R21.2 37,16.9
N$40
  Bottom 0.254: U13.2 23.5,13.25 23.9,13.65 25.75,13.65 R22.1
N$41
  Bottom 0.152: R23.2 21,11.8 21.3,11.5 21.9,11.5 22.35,11.95 22.55,11.95 U13.3
PANEL1+2  (via drill 0.3)
  Top 0.3: U1.6 9.39,38.59 9.5,38.7
  Top 0.406: C3.2 2.6,35.3 3,35.7 v6.1,35.7 6.35,35.7 6.72,36.08 U$4.P1 7.5,38.7 9.5,38.7 12.6,38.7 U$5.P1
  Bottom 0.3: L1.2 5.99,35.59 v6.1,35.7
PANEL3+4  (via drill 0.3)
  Top 0.3: U2.6 21,38.7
  Top 0.406: U$6.P1 23,38.7 21,38.7 17.8,38.7 U$7.P1 16.25,36.85 v16.1,36.7 14.2,34.8 C2.2
  Bottom 0.3: L2.2 16.6,31.99 16.6,36.2 v16.1,36.7
PANEL5+6  (via drill 0.3)
  Top 0.3: U3.6 32.59,34.59 33.4,35.4 U$9.P1
  Top 0.406: C1.2 25.8,34.45 v27.43,36.08 U$8.P1 28.2,38.7 33.4,38.7 U$9.P1
  Bottom 0.406: L3.2 28.9,31.29 28.9,34.6 v27.43,36.08
SCK  (via drill 0.3)
  Top 0.254: v13.5,2.7 U$3.P$33
  Bottom 0.254: U$2.P$33 v13.5,2.7
SCL  (via drill 0.3)
  Top 0.254: U$3.P$29 v12.9,12.1
  Bottom 0.152: v12.9,12.1 11.8,12.1 11.63,11.94 U10.14
  Bottom 0.254: v12.9,12.1 U$2.P$29
SDA  (via drill 0.3)
  Top 0.254: U$3.P$30 v12.3,11.3
  Bottom 0.152: U10.15 12.27,11.27 v12.3,11.3
  Bottom 0.254: v12.3,11.3 U$2.P$30
SW1_EN  (via drill 0.3)
  Top 0.152: v39.9,21.1 39.8,21.1 39.2,21.7 38.2,21.7 36.1,19.6 36.1,16.7 35.75,16.35 v33.25,16.35
  Bottom 0.152: U10.4 1.63,12.57 1.4,12.8 1.4,15.7 1.9,16.2 15.1,16.2 15.28,16.45 19.09,16.45 19.18,16.54 21.43,16.54 22.7,17.8 31.3,17.8 32.75,16.35 v33.25,16.35
  Bottom 0.254: U11.4 41.04,17.94 41.2,18.1 41.2,20.8 40.9,21.1 v39.9,21.1
SW2_EN  (via drill 0.3)
  Top 0.152: U12.4 v39.59,12.71 v39.6,12.7 | v32.85,10.15 32.85,13.7 30.95,15.6 17.5,15.6 15.7,17.4 13.8,17.4 13.1,16.7 13.1,16 12.75,15.65 6.75,15.65 6.3,15.2 v6.3,13.25
  Bottom 0.152: v39.6,12.7 35.4,12.7 v32.85,10.15 | v6.3,13.25 4.33,13.25 U10.5
SW3_EN  (via drill 0.3)
  Top 0.152: v19.4,14 19.6,13.8 19.6,13.35 20.85,12.1 v21.65,12.1
  Bottom 0.152: U13.4 22.56,14.41 22.3,14.15 22.3,13.8 22,13.5 22,12.45 v21.65,12.1 | v19.4,14 19.1,14 18.8,14.3 18.8,15.3 18.1,16 15.8,16 15.5,15.7 2.35,15.7 1.95,15.3 1.95,14.1 2.2,13.85 4.29,13.85 U10.6
UNPROTECTED3V3  (via drill 0.3)
  Top 0.152: v19.4,14.85 v28.3,14.85
  Top 0.254: U6.10 17.53,21.47 17.85,21.15 20.15,21.15 20.47,21.47 | U6.1 20.47,21.47 | v27.45,18.6 U8.6 28.82,18.6 29.7,18.6 30.1,19 30.1,20 29.61,20.49 U8.4 29.51,20.49 | v32.8,20.4 34.55,22.15 R6.1 34.85,22.15 | 20.47,21.47 22.7,19.25 C10.2 v24.35,19.25 24.35,17.35 v24.4,17.2 | R21.1 39.3,17.7 | 39.3,17.7 39.3,20.1 v38.65,20.75 | 39.16,15.34 39.16,17.56 39.3,17.7
  Top 0.406: U12.6 39.16,15.34
  Bottom 0.152: R23.1 19.75,15.2 v19.4,14.85 | U13.6 24.45,15.23 24.45,14.25 24.5,14.2 27.65,14.2 v28.3,14.85
  Bottom 0.254: v24.35,19.25 26.8,19.25 v27.45,18.6 29.85,18.6 31.65,20.4 v32.8,20.4 | R8.1 | R8.1 v38.65,20.75 37.08,22.32 34.72,22.32 v32.8,20.4 | U11.6 39.24,16.06 39,16.3 39,19 R8.1 | 33.5,21.1 v32.8,20.4 | U13.6 24.4,15.29 v24.4,17.2

## Text on the board
tDocu: C3 | C4 | U1 | R17 | C2 | C5 | U2 | R15 | C1 | C6 | U3 | R16 | LTC3105 | LTC3105 | LTC3105 | 10μF | 10μF | 466kΩ | 10μF | 10μF | 466kΩ | 10μF | 10μF | C16 | R11 | R12 | C11 | C14 | R9 | R10 | C12 | C15 | R14 | R13 | C13 | 1μF | 15kΩ | 4.7kΩ | 4.7μF | 1μF | 15kΩ | 4.7kΩ | 4.7μF | 1μF | 15kΩ | 4.7kΩ | C7 | C8 | C9 | R5 | R6 | U4 | U5 | U9 | U6 | U7 | 4.7μF | LTC4413 | LTC4413 | 4.7μF | BQ24210 | TPS63001 | 10μF | 35.7kΩ | 35.7kΩ | TPS2552 | U8 | R2 | R1 | R18 | R19 | C10 | R3 | R4 | MCP130T | TPS2552 | 470kΩ | 470kΩ | 787Ω | 21.5kΩ | U$1 | 35.7kΩ | 35.7kΩ
bDocu: 10μF